# Altium PCB final_sensor_pcb_v3.PcbDoc (part 3 of 3)
Units mm, origin at the board's own origin, x right, y up, seen from the top; angles counter-clockwise.
Board outline 108.2 x 22.22 mm, 2 copper layers (Top Layer, Bottom Layer); 94 components, 57 nets, 253 pads, 98 vias.
Unrouted connection lines stored in the file: 1.
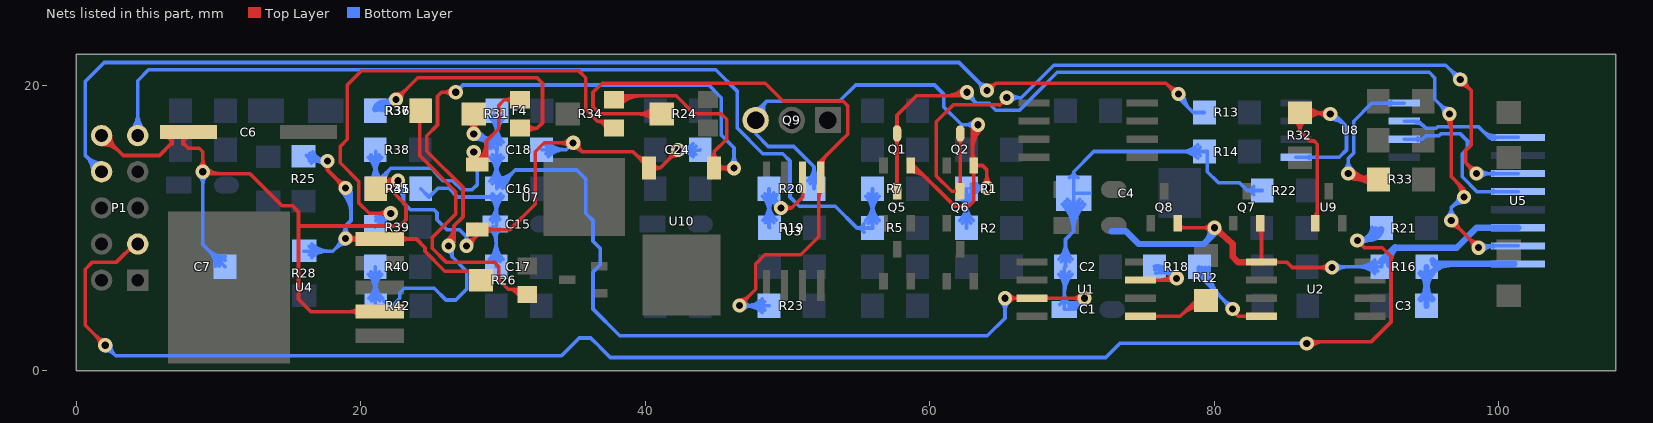
[diagram p3: the nets of this part, all layers, seen from the top]

## Via types
v1: diameter 1, hole 0.5, Top Layer to Bottom Layer, 98 vias

## Nets (pads, with @x,y where several pads share a name; then routed paths per layer and width w, separated by ;. In a path a pad name is that pad's centre, name@x,y a point inside that pad or via, vN(x,y) a via of type N, cw(c..) or ccw(c..) an arc to the next point about the centre after c; other vN are vias at no path point) (continued)
NetR18_1: R18.1 U2.4 | length 14.8
  Top Layer w0.254: v1(81.28,4.318) 81.28,4.191 81.661,3.81 U2.4@83.312,3.81 ; U2.4@82.375,3.723 ccw(c82.165,3.513) 82.165,3.81 ccw(c82.165,4.107) U2.4@82.375,3.897
  Bottom Layer w0.254: R18.1@78.854,7.24 ccw(c80.051,7.24) 79.205,6.393 ; R18.1@78.943,7.29 78.943,6.655 v1(81.28,4.318) ; R18.1@79.108,7.24 ccw(c80.918,7.24) 79.638,5.96 ; R18.1@79.362,7.24 ccw(c81.786,7.24) 80.072,5.526 ; R18.1@79.616,7.24 ccw(c82.653,7.24) 80.506,5.092 ; v1@80.907,4.318 ccw(c80.007,4.318) 80.643,4.955 ccw(c81.28,5.591) v1@81.28,4.691
NetR19_2: R19.2 R20.1 U3.6 | length 20.4
  Top Layer w0.254: v1(49.53,11.43) 50.292,11.43 ; v1@49.825,11.201 cw(c50.292,10.838) 50.292,11.43 ; v1@49.825,11.659 ccw(c50.292,12.022) 50.292,11.43 ; U3.6@50.967,12.648 cw(c50.757,12.438) 51.054,12.438 cw(c51.351,12.438) U3.6@51.141,12.648 ; U3.6@51.054,13.585 51.054,12.192 50.292,11.43
  Bottom Layer w0.254: R20.1@48.216,12.25 cw(c47.067,11.101) 48.692,11.101 cw(c50.317,11.101) R20.1@49.168,12.25 ; R19.2@48.253,10.559 ccw(c47.195,11.618) 48.692,11.618 ; R20.1@48.396,12.43 cw(c47.68,11.715) 48.692,11.715 cw(c49.703,11.715) R20.1@48.988,12.43 ; R19.2@48.433,10.379 ccw(c47.808,11.004) 48.692,11.004 ; 48.692,11.185 ccw(c49.831,11.185) R19.2@49.025,10.379 ; 48.692,11.798 ccw(c50.444,11.798) R19.2@49.205,10.559 ; R20.1@48.692,12.053 cw(c48.692,11.534) 49.059,11.901 ; R20.1@48.692,12.649 R20.1@48.692,12.776 R20.1@48.692,12.268 ; R19.2@48.729,10.033 48.692,10.07 R20.1@48.692,12.268 ; R20.1@49.035,12.485 ccw(c49.425,12.21) 49.087,11.873 ; v1@49.157,11.43 ccw(c48.257,11.43) 48.893,12.067 ccw(c49.53,12.703) v1@49.53,11.803 ; R20.1@49.242,12.339 ccw(c49.676,12.034) v1@49.301,11.659 ; v1(49.53,11.43) R20.1@48.692,12.268
NetR23_1: R23.1 R24.2 U3.5 | length 58.9
  Top Layer w0.254: 36.322,19.558 36.322,18.542 36.83,18.034 R24.2@41.149,18.034 ; 36.325,19.558 36.96,20.193 48.419,20.193 49.689,18.923 53.9,18.923 54.229,18.594 54.229,16.61 53.915,16.296 53.888,16.296 52.324,14.732 ; R24.2@40.623,17.558 ccw(c39.474,16.409) 39.474,18.034 ccw(c39.474,19.659) R24.2@40.623,18.51 ; R24.2@40.803,17.738 ccw(c40.087,17.022) 40.087,18.034 ccw(c40.087,19.046) R24.2@40.803,18.33 ; v1(46.609,4.572) 47.752,5.715 47.752,7.493 48.387,8.128 50.927,8.128 52.197,9.398 52.197,13.458 U3.5@52.324,13.585 52.324,14.732 ; v1@46.609,4.945 ccw(c46.609,5.845) 47.246,5.209 ccw(c47.882,4.572) v1@46.982,4.572 ; U3.5@52.193,14.435 cw(c52.594,14.435) 52.31,14.718 ; 52.197,12.131 cw(c52.928,12.131) U3.5@52.411,12.648 ; U3.5@52.237,14.522 ccw(c52.027,14.732) 52.324,14.732 ; U3.5@52.411,14.522 cw(c52.621,14.732) 52.324,14.732 ; U3.5@52.447,14.435 cw(c53.461,14.435) 52.744,15.152
  Bottom Layer w0.254: v1(46.609,4.572) 46.634,4.547 R23.1@48.692,4.547 ; v1@46.873,4.308 cw(c47.448,3.733) 47.448,4.547 ; v1@46.873,4.836 ccw(c47.571,5.534) 47.571,4.547 ; R23.1@48.216,4.071 ccw(c47.067,2.922) 47.067,4.547 ccw(c47.067,6.171) R23.1@48.216,5.023 ; R23.1@48.396,4.25 ccw(c47.68,3.535) 47.68,4.547 ccw(c47.68,5.558) R23.1@48.396,4.843
NetR25_1: R25.1 R26.2 R28.2 U4.5 | length 43.1
  Top Layer w0.254: v1@17.471,14.406 cw(c17.299,14.097) 17.653,14.097 ; v1(17.653,14.732) 17.653,14.097 ; v1@17.835,14.406 ccw(c18.007,14.097) 17.653,14.097 ; v1@18.55,12.827 ccw(c17.65,12.827) 18.286,13.464 ccw(c18.923,14.1) v1@18.923,13.2 ; v1(18.923,9.271) U4.5@20.447,9.271 ; v1(18.923,12.827) 17.653,14.097 ; v1@19.165,9.271 cw(c19.165,8.271) U4.5@19.872,8.978 ; v1@19.187,9.007 cw(c19.823,8.371) 19.823,9.271 cw(c19.823,10.171) v1@19.187,9.535 ; v1@19.306,9.271 ccw(c19.306,10.072) U4.5@19.872,9.506 ; U4.5@21.336,9.242 23.905,9.242 24.511,8.636 24.511,8.382 25.908,6.985 27.814,6.985 R26.2@28.449,6.35 R26.2@28.575,6.35 ; U4.5@22.8,8.978 cw(c23.436,8.342) 23.436,9.242 cw(c23.436,10.142) U4.5@22.8,9.506
  Bottom Layer w0.254: R28.2@16.002,8.382 18.034,8.382 v1(18.923,9.271) 18.923,10.16 ; R25.1@16.174,15.136 ccw(c16.829,15.465) 16.829,14.732 ; R28.2@16.374,8.125 cw(c16.995,7.503) 16.995,8.382 ; R28.2@16.374,8.717 ccw(c17.183,9.526) 17.183,8.382 ; R25.1@16.383,14.732 v1(17.653,14.732) cw(c17.653,15.879) R25.1@16.628,15.364 ; R25.1@16.401,15.25 ccw(c17.241,15.672) v1@17.241,14.732 ; R25.1@16.503,14.586 cw(c16.854,14.235) 16.854,14.732 ; R28.2@16.553,7.945 cw(c17.609,6.89) 17.609,8.382 ; R28.2@16.553,8.897 ccw(c17.796,10.139) 17.796,8.382 ; v1@17.389,14.468 ccw(c16.753,13.832) 16.753,14.732 ccw(c16.753,15.632) v1@17.389,14.996 ; v1@18.55,9.271 cw(c17.65,9.271) 18.286,8.634 cw(c18.923,7.998) v1@18.923,8.898 ; v1@18.659,12.563 cw(c17.103,11.007) 19.304,11.007 ; v1@18.662,9.537 ccw(c18.05,10.16) 18.923,10.16 ; v1@18.839,12.743 cw(c17.716,11.62) 19.304,11.62 ; v1(18.923,12.827) 19.05,12.827 19.304,12.573 19.304,10.541 18.923,10.16 ; v1@19.018,12.922 cw(c18.329,12.233) 19.304,12.233 ; v1@19.184,9.537 cw(c19.796,10.16) 18.923,10.16
NetR26_1: R26.1 R36.1 | length 22.1
  Top Layer w0.254: R36.1@24.13,17.721 24.13,15.113 26.67,12.573 26.67,11.005 25.019,9.354 25.019,8.592 25.991,7.62 29.368,7.62 29.68,7.308 29.68,6.388 30.353,5.715 ; R36.1@24.206,18.263 R36.1@24.858,18.263 ; 30.731,5.715 cw(c30.731,4.997) R26.1@31.396,5.267 ; R26.1@31.108,5.715 cw(c31.108,5.15) R26.1@31.631,5.363 ; R26.1@31.161,5.172 ccw(c30.353,4.843) 30.353,5.715 ; R26.1@31.273,5.715 30.353,5.715
NetR31_1: R31.1 R37.1 | length 25.7
  Top Layer w0.254: v1(22.479,19.05) 24.003,20.574 32.385,20.574 32.766,20.193 32.766,17.399 32.385,17.018 ; v1@22.479,19.423 ccw(c22.479,20.323) 23.116,19.687 ccw(c23.752,19.05) v1@22.852,19.05 ; R31.1@31.242,17.018 32.385,17.018 ; R31.1@31.627,16.702 cw(c32.385,15.953) 32.385,17.018 ; R31.1@31.643,17.349 ccw(c32.385,18.013) 32.385,17.018
  Bottom Layer w0.254: R37.1@20.918,18.325 cw(c21.604,18.23) R37.1@21.604,18.923 ; R37.1@21.006,18.263 R37.1@21.666,18.923 ; R37.1@21.169,18.29 cw(c21.896,18.189) 21.896,18.923 ; R37.1@21.421,18.255 cw(c22.187,18.149) v1@22.187,18.923 ; R37.1@21.672,18.22 cw(c22.479,18.109) 22.479,18.923 R37.1@21.666,18.923 ; 21.885,18.923 cw(c21.885,18.456) v1@22.215,18.786 ; v1@22.146,19.218 cw(c21.666,19.461) R37.1@21.666,18.923
NetR31_3: R31.3 R38.1 R41.2 U7.1 | length 40.5
  Top Layer w0.254: U7.1@27.648,14.772 ccw(c27.187,15.367) v1(27.94,15.367) U7.1@27.94,14.605 ; v1@27.711,15.072 cw(c27.348,14.605) U7.1@27.94,14.605 ; v1@27.94,15.225 ccw(c28.625,15.225) U7.1@28.141,14.741 ; v1@28.169,15.072 ccw(c28.532,14.605) U7.1@27.94,14.605 ; U7.1@28.177,14.477 28.574,14.477 28.829,14.732 28.829,16.129 ; U7.1@28.224,14.752 ccw(c26.958,16.129) 28.829,16.129 ; U7.1@28.396,14.565 ccw(c27.49,15.55) 28.829,15.55 ; U7.1@28.568,14.378 ccw(c28.022,14.971) U7.1@28.829,14.971 ; R31.3@30.727,18.732 ccw(c30.083,18.196) 30.083,19.034 ; R31.3@30.727,19.336 cw(c30.083,19.872) 30.083,19.034 ; R31.3@31.191,19.034 30.083,19.034 ; 28.829,16.129 29.683,16.983 29.683,18.634 30.083,19.034
  Bottom Layer w0.254: R38.1@20.53,14.994 cw(c19.291,13.754) 21.043,13.754 ; R41.2@20.567,13.302 ccw(c19.418,14.451) 21.043,14.451 ccw(c22.668,14.451) R41.2@21.519,13.302 ; R38.1@20.71,15.173 cw(c19.904,14.368) 21.043,14.368 ; R41.2@20.747,13.123 ccw(c20.032,13.838) 21.043,13.838 ccw(c22.055,13.838) R41.2@21.339,13.123 ; R41.2@21.043,13.499 ccw(c21.043,14.296) 21.607,13.733 ; 21.043,13.935 cw(c22.54,13.935) R38.1@21.482,14.994 ; 21.043,14.548 cw(c21.927,14.548) R38.1@21.302,15.173 ; R38.1@21.043,15.406 R41.2@21.043,12.776 21.043,13.169 22.098,14.224 ; R41.2@21.205,12.857 cw(c21.962,12.999) R41.2@21.418,13.544 ; R41.2@21.455,12.904 cw(c22.534,13.107) 21.758,13.884 ; R41.2@21.705,12.951 cw(c23.107,13.215) 22.098,14.224 ; v1(27.94,15.367) 27.94,14.859 28.194,14.605 28.194,13.081 27.813,12.7 27.11,12.7 26.483,13.327 25.789,13.327 25.387,13.729 25.387,13.784 24.947,14.224 22.098,14.224
NetR32_1: R32.1 U8.5 U9.1 | length 27.7
  Top Layer w0.254: R32.1@85.636,17.547 cw(c85.19,16.866) 86.004,16.866 ; R32.1@86.351,17.814 cw(c87.066,17.099) 87.066,18.11 cw(c87.066,19.122) R32.1@86.351,18.406 ; R32.1@86.373,17.547 ccw(c86.819,16.866) 86.004,16.866 ; R32.1@86.53,17.634 cw(c87.679,16.485) 87.679,18.11 cw(c87.679,19.735) R32.1@86.53,18.586 ; U9.1@86.97,10.746 ccw(c86.328,11.388) 87.235,11.388 ; 87.054,18.11 cw(c87.054,16.95) v1@87.874,17.77 ; U9.1@87.092,10.349 87.235,10.492 87.235,15.905 87.012,16.128 86.742,16.128 86.004,16.866 ; 87.421,18.11 ccw(c87.421,18.751) v1@87.874,18.298 ; v1@88.062,18.11 R32.1@86.004,18.11 86.004,16.866
  Bottom Layer w0.254: U8.5@85.729,14.986 88.773,14.986 89.281,15.494 89.281,17.145 88.646,17.78 88.392,17.78 v1(88.138,18.034) ; U8.5@86.666,14.899 cw(c86.876,14.689) 86.876,14.986 cw(c86.876,15.283) U8.5@86.666,15.073 ; v1@88.138,17.661 cw(c88.138,16.147) 89.208,17.218 ; v1@88.138,17.915 cw(c88.138,17.015) 88.775,17.651
NetR33_2: R33.2 U8.1 | length 20.2
  Top Layer w0.254: v1@89.313,13.748 ccw(c90.063,14.498) 90.063,13.437 ; v1(89.408,13.843) 89.814,13.437 R33.2@91.528,13.437 ; v1@89.492,13.927 ccw(c90.676,15.111) 90.676,13.437 ; v1@89.672,14.107 ccw(c91.29,15.725) R33.2@91.29,13.437 ; R33.2@91.052,12.961 ccw(c89.903,11.812) 89.903,13.437 ccw(c89.903,15.061) R33.2@91.052,13.912 ; R33.2@91.232,13.14 ccw(c90.517,12.425) 90.517,13.437 ccw(c90.517,14.448) R33.2@91.232,13.733
  Bottom Layer w0.254: v1@89.144,14.107 ccw(c88.508,14.743) 89.408,14.743 ccw(c90.308,14.743) v1@89.672,14.107 ; v1(89.408,13.843) 89.408,14.903 89.789,15.284 89.789,17.526 91.059,18.796 U8.1@93.345,18.796 ; U8.1@92.408,18.709 ccw(c92.198,18.499) 92.198,18.796 ccw(c92.198,19.093) U8.1@92.408,18.883
NetR34_1: R34.1 R39.1 | length 44.9
  Top Layer w0.254: v1@21.834,10.785 ccw(c21.198,10.149) 21.198,11.049 ccw(c21.198,11.949) v1@21.834,11.313 ; v1(22.098,11.049) 20.582,11.049 19.862,11.769 19.862,13.285 18.542,14.605 18.542,15.748 19.05,16.256 19.05,20.066 20.066,21.082 35.306,21.082 35.814,20.574 35.814,18.332 36.62,17.526 ; 36.903,17.526 cw(c36.903,16.948) R34.1@37.477,17.01 ; R34.1@37.186,17.526 cw(c37.186,16.979) R34.1@37.73,17.038 ; R34.1@37.225,16.983 ccw(c36.62,16.917) 36.62,17.526 ; R34.1@37.795,17.034 37.303,17.526 36.62,17.526
  Bottom Layer w0.254: R39.1@21.006,10.08 v1@22.098,11.172 ; R39.1@21.044,10.547 ccw(c21.122,11.383) R39.1@21.715,10.789 ; R39.1@21.068,10.8 ccw(c21.187,12.083) v1@22.098,11.172 ; R39.1@21.251,10.325 cw(c22.098,9.478) v1@22.098,10.676 ; R39.1@21.425,10.136 cw(c22.272,10.148) R39.1@21.673,10.747 ; R39.1@21.548,10.622 ccw(c21.122,11.049) v1@21.725,11.049 ; R39.1@21.679,10.139 cw(c23.11,10.16) v1@22.098,11.172 ; R39.1@21.685,10.759 cw(c22.098,10.346) v1@22.098,10.93 ; v1(22.098,11.049) v1@22.098,11.172
NetR34_3: R34.3 R40.1 R42.2 U10.1 | length 89.2
  Top Layer w0.254: v1@25.959,9.076 ccw(c25.248,10.168) 26.551,10.168 ; v1@26.097,8.863 ccw(c25.553,9.7) 26.551,9.7 ; v1@26.236,8.65 ccw(c25.857,9.231) 26.551,9.231 ; v1@26.406,19.294 ccw(c25.77,18.658) 25.77,19.558 ccw(c25.77,20.458) v1@26.406,19.822 ; v1@26.551,9.017 26.551,10.168 ; v1(26.67,19.558) 25.675,19.558 25.387,19.27 25.387,17.255 24.638,16.506 24.638,15.411 27.178,12.871 27.178,10.795 26.551,10.168 ; R34.3@37.87,19.059 cw(c38.462,18.467) R34.3@38.462,19.304 ; R34.3@38.05,18.879 cw(c39.076,17.853) 39.076,19.304 ; R34.3@38.229,18.7 cw(c39.689,17.24) 39.689,19.304 ; R34.3@38.354,19.177 38.481,19.304 42.164,19.304 43.434,18.034 45.339,18.034 45.72,17.653 45.72,16.256 44.83,15.366 ; U10.1@44.584,14.821 ccw(c44.104,15.366) 44.83,15.366 ; U10.1@45.076,14.821 cw(c45.556,15.366) 44.83,15.366 ; U10.1@45.094,13.977 cw(c45.73,13.341) 45.73,14.241 cw(c45.73,15.142) U10.1@45.094,14.505 ; U10.1@45.286,14.241 cw(c45.286,13.282) v1@45.964,13.96 ; 45.369,14.241 ccw(c45.369,15.083) v1@45.964,14.488 ; v1@46.211,14.241 U10.1@44.83,14.241 44.83,15.366
  Bottom Layer w0.254: R40.1@20.53,6.764 cw(c19.381,5.615) 21.006,5.615 cw(c22.631,5.615) R40.1@21.482,6.764 ; R42.2@20.567,5.073 ccw(c19.509,6.131) 21.006,6.131 ; R40.1@20.71,6.944 cw(c19.994,6.228) 21.006,6.228 cw(c22.017,6.228) R40.1@21.302,6.944 ; R42.2@20.747,4.893 ccw(c20.122,5.518) 21.006,5.518 ; R42.2@21.006,4.521 R40.1@21.006,7.29 ; 21.006,5.699 ccw(c22.145,5.699) R42.2@21.339,4.893 ; 21.006,6.312 ccw(c22.758,6.312) R42.2@21.519,5.073 ; R42.2@21.043,4.547 22.2,4.547 ; R42.2@21.628,4.214 cw(c22.2,3.89) 22.2,4.547 ; R42.2@21.628,4.879 ccw(c22.2,5.204) 22.2,4.547 ; v1@26.071,8.401 cw(c25.961,7.96) 26.416,7.96 ; v1@26.133,8.648 cw(c26.042,8.285) 26.416,8.285 ; v1@26.416,8.763 26.416,8.001 27.432,6.985 27.432,5.715 26.67,4.953 25.989,4.953 25.164,5.778 23.05,5.778 22.733,5.461 22.733,5.08 22.2,4.547 ; v1(26.67,19.558) 27.178,20.066 44.45,20.066 45.339,19.177 45.339,16.554 46.228,15.665 v1(46.228,14.224) ; v1@45.964,14.488 ccw(c45.328,15.124) 46.228,15.124 ccw(c47.128,15.124) v1@46.492,14.488
  other v1: 26.162,8.763
OFFSET+: Q1.3 Q5.3 U5.2 | length 82.2
  Top Layer w0.254: Q5.3@57.567,12.996 ccw(c57.272,13.292) 57.689,13.292 ccw(c58.107,13.292) Q5.3@57.811,12.996 ; Q1.3@57.567,16.266 cw(c57.271,15.97) 57.689,15.97 cw(c58.107,15.97) Q1.3@57.811,16.266 ; Q1.3@57.567,17.06 ccw(c57.271,17.356) 57.689,17.356 ccw(c58.107,17.356) Q1.3@57.811,17.06 ; Q5.3@57.689,12.599 Q1.3@57.689,16.663 57.689,17.938 59.055,19.304 62.484,19.304 v1@62.611,19.431 ; 61.097,19.304 ccw(c61.097,21.072) v1@62.347,19.822 ; 61.711,19.304 ccw(c61.711,20.458) v1@62.527,19.642 ; v1@96.256,17.77 cw(c95.313,16.827) 96.647,16.827 ; v1@96.436,17.95 cw(c95.926,17.44) 96.647,17.44 cw(c97.114,17.44) v1@96.784,17.77 ; v1@96.647,10.168 cw(c96.647,9.268) 97.284,9.904 cw(c97.92,10.541) v1@97.02,10.541 ; v1(96.647,10.541) v1(98.552,8.636) ; v1@96.647,18.145 96.647,13.633 97.536,12.744 v1(97.536,12.192) ; 96.943,13.337 cw(c95.798,12.192) v1@97.417,12.192 ; 97.376,12.903 cw(c96.665,12.192) v1@97.671,12.192 ; v1@98.179,8.636 ccw(c97.279,8.636) 97.915,9.273 ccw(c98.552,9.909) v1@98.552,9.009
  Bottom Layer w0.254: v1@62.611,19.185 cw(c62.611,18.591) 63.031,19.011 ; v1@62.611,19.431 63.246,18.796 64.135,18.796 64.635,18.296 66.302,18.296 67.31,19.304 ; v1@62.979,19.496 ccw(c63.698,19.375) 63.182,18.86 ; 67.373,19.367 67.31,19.304 ; v1@96.147,18.034 ccw(c95.247,18.034) 95.883,18.671 ccw(c96.52,19.307) v1@96.52,18.407 ; v1@96.383,10.805 ccw(c95.747,11.441) 96.647,11.441 ccw(c97.547,11.441) v1@96.911,10.805 ; v1(96.52,18.034) 95.496,19.058 95.496,20.558 95.099,20.955 68.961,20.955 67.31,19.304 ; 96.641,11.448 cw(c97.536,10.554) v1@97.536,11.819 ; v1(96.647,10.541) 96.647,11.454 v1@97.46,12.268 ; 97.006,11.813 ccw(c96.627,12.192) v1@97.163,12.192 ; 97.075,11.882 cw(c97.536,11.421) v1@97.536,12.073 ; v1(98.552,8.636) 98.425,8.763 U5.2@101.346,8.763 ; v1@98.636,8.552 cw(c99.146,8.042) 99.146,8.763 cw(c99.146,9.23) v1@98.816,8.9 ; v1@98.816,8.372 cw(c99.759,7.429) U5.2@99.759,8.763 ; U5.2@99.604,8.676 ccw(c99.394,8.466) 99.394,8.763 ccw(c99.394,9.06) U5.2@99.604,8.85
  other v1: 62.611,19.558
OFFSET-: Q2.3 Q6.3 U5.6 | length 69
  Top Layer w0.254: Q6.3@62.012,12.477 ccw(c61.716,12.181) 61.716,12.599 ccw(c61.716,13.017) Q6.3@62.012,12.721 ; Q6.3@62.012,12.996 ccw(c61.716,13.292) 62.134,13.292 ccw(c62.552,13.292) Q6.3@62.256,12.996 ; Q2.3@62.012,16.266 cw(c61.716,15.97) 62.134,15.97 cw(c62.552,15.97) Q2.3@62.256,16.266 ; Q6.3@62.134,12.599 61.525,12.599 60.452,13.672 60.452,17.482 61.639,18.669 64.881,18.669 64.889,18.661 v1@65.389,19.034 ; Q6.3@62.134,12.599 Q2.3@62.134,16.663 ; v1@97.282,20.074 cw(c97.282,19.174) 97.919,19.81 cw(c98.555,20.447) v1@97.655,20.447 ; v1(97.282,20.447) 98.044,19.685 98.044,15.851 97.663,15.47 97.663,14.605 v1(98.425,13.843) v1@98.171,14.097 ; v1@98.052,13.843 ccw(c97.152,13.843) 97.788,14.48 ccw(c98.425,15.116) v1@98.425,14.216
  Bottom Layer w0.254: v1(65.405,19.177) 66.421,19.177 68.707,21.463 96.266,21.463 v1(97.282,20.447) ; v1@65.669,18.913 cw(c66.305,18.277) 66.305,19.177 cw(c66.305,20.077) v1@65.669,19.441 ; v1@96.909,20.447 ccw(c96.009,20.447) 96.645,21.084 ccw(c97.282,21.72) v1@97.282,20.82 ; v1(98.425,13.843) U5.6@101.346,13.843 ; v1@98.689,13.579 cw(c99.325,12.943) 99.325,13.843 cw(c99.325,14.743) v1@98.689,14.107 ; U5.6@99.604,13.756 ccw(c99.394,13.546) 99.394,13.843 ccw(c99.394,14.14) U5.6@99.604,13.93
OP_OUT: Q1.2 Q2.2 Q9.3 R1.2 R2.2 R20.2 | length 73.6
  Top Layer w0.254: Q1.2@58.639,13.965 cw(c58.639,12.335) 59.791,13.488 ; Q1.2@58.639,14.219 cw(c58.639,13.203) 59.358,13.921 ; Q1.2@58.639,14.413 58.866,14.413 61.722,11.557 62.738,11.557 63.084,11.903 Q2.2@63.084,14.413 ; Q1.2@58.639,14.473 cw(c58.639,14.07) Q1.2@58.924,14.355 ; Q2.2@62.962,14.016 cw(c62.666,13.72) 63.084,13.72 cw(c63.502,13.72) Q2.2@63.206,14.016 ; 62.992,15.328 ccw(c63.724,15.328) Q2.2@63.206,14.81 ; 62.992,15.452 cw(c65.193,15.452) v1@63.637,17.008 ; 62.992,16.065 cw(c64.58,16.065) v1@63.457,17.188 ; 62.992,16.678 cw(c63.967,16.678) v1@63.278,17.367 ; v1@62.992,17.018 62.992,14.505 Q2.2@63.084,14.413 ; Q2.2@63.206,14.291 cw(c63.502,13.995) 63.502,14.413 cw(c63.502,14.831) Q2.2@63.206,14.535 ; v1@63.744,13.091 ccw(c63.108,13.727) 64.008,13.727 ccw(c64.908,13.727) v1@64.272,13.091 ; v1(64.008,12.827) 64.008,14.097 63.692,14.413 Q2.2@63.084,14.413
  Bottom Layer w0.254: Q9.3@47.752,18.4 ccw(c47.752,18.977) 48.16,18.569 ; Q9.3@47.995,17.76 cw(c48.477,18.073) 48.071,18.48 ; Q9.3@48.208,17.899 cw(c48.746,18.248) 48.292,18.701 ; Q9.3@48.421,18.037 cw(c49.014,18.423) 48.514,18.923 ; R20.2@51.411,13.332 ccw(c50.551,14.312) 51.855,14.312 ; R20.2@51.578,13.141 ccw(c51.043,13.751) 51.855,13.751 ccw(c52.667,13.751) R20.2@52.131,13.141 ; R20.2@51.855,12.776 51.855,14.312 ; R20.2@52.299,13.332 cw(c53.159,14.312) 51.855,14.312 ; R2.2@62.096,10.543 ccw(c60.947,11.691) 62.572,11.691 ccw(c64.197,11.691) R2.2@63.048,10.543 ; R1.2@62.096,12.25 cw(c60.947,11.101) 62.572,11.101 cw(c64.197,11.101) R1.2@63.048,12.25 ; R2.2@62.276,10.363 ccw(c61.561,11.078) 62.572,11.078 ccw(c63.584,11.078) R2.2@62.868,10.363 ; R1.2@62.276,12.43 cw(c61.561,11.715) 62.572,11.715 cw(c63.584,11.715) R1.2@62.868,12.43 ; R2.2@62.572,10.017 R1.2@62.572,12.776 ; R1.2@62.826,12.827 v1(64.008,12.827) ; R1.2@62.895,12.558 cw(c63.467,12.083) 63.467,12.827 ; R1.2@62.894,13.095 ccw(c63.465,13.571) 63.465,12.827 ; v1@62.992,17.272 62.23,17.272 60.96,18.542 60.96,19.431 60.325,20.066 54.781,20.066 53.638,18.923 48.514,18.923 ; R1.2@63.089,13.257 ccw(c64.008,14.023) v1(64.008,12.827) ; R1.2@63.09,12.396 cw(c64.008,11.634) v1(64.008,12.827) ; v1@63.109,17.008 ccw(c62.473,16.372) 62.473,17.272 ccw(c62.473,18.172) v1@63.109,17.536 ; v1@63.744,12.563 ccw(c63.108,11.927) 63.108,12.827 ccw(c63.108,13.727) v1@63.744,13.091 ; 48.514,18.923 47.752,18.161 47.752,16.637 48.641,15.748 50.419,15.748 51.855,14.312
  other v1: 63.373,17.272
OUT_N: U5.8 U8.2 | length 12.8
  Bottom Layer w0.254: U8.2@93.345,17.526 94.361,17.526 94.869,17.018 95.572,17.018 95.691,17.137 98.56,17.137 99.314,16.383 U5.8@101.346,16.383 U5.8@99.568,16.383 ; U8.2@94.195,17.403 cw(c94.195,16.705) 94.688,17.199 ; 98.837,16.86 ccw(c99.691,17.713) U5.8@99.691,16.506 ; 99.271,16.426 ccw(c99.691,16.846) U5.8@99.691,16.252 ; U5.8@99.604,16.296 ccw(c99.394,16.086) 99.394,16.383 ccw(c99.394,16.68) U5.8@99.604,16.47
OUT_P: U5.5 U8.3 | length 12.8
  Bottom Layer w0.254: U8.3@93.345,16.256 94.615,16.256 94.869,16.51 95.782,16.51 95.901,16.629 97.29,16.629 97.79,16.129 97.79,15.621 97.409,15.24 97.409,13.613 98.449,12.573 U5.5@101.346,12.573 ; U8.3@94.282,16.169 cw(c94.492,15.959) 94.492,16.256 cw(c94.492,16.553) U8.3@94.282,16.343 ; U5.5@99.604,12.486 ccw(c99.394,12.276) 99.394,12.573 ccw(c99.394,12.87) U5.5@99.604,12.66
OUT_RESET: R12.2 U1.5 | length 9.7
  Top Layer w0.254: U1.5@74.799,3.81 77.597,3.81 78.713,4.926 R12.2@79.4,4.926 ; U1.5@75.736,3.723 cw(c75.946,3.513) 75.946,3.81 cw(c75.946,4.107) U1.5@75.736,3.897 ; 77.675,3.888 cw(c79.183,2.379) R12.2@79.323,4.508 ; 78.071,4.284 cw(c79.232,3.123) R12.2@79.34,4.762 ; 78.468,4.681 cw(c79.281,3.867) R12.2@79.356,5.015
OUT_SET: R18.2 U1.7 | length 12.5
  Top Layer w0.254: U1.7@74.799,6.35 77.216,6.35 v1(77.343,6.477) ; U1.7@75.736,6.263 cw(c75.946,6.053) 75.946,6.35 cw(c75.946,6.647) U1.7@75.736,6.437 ; 76.136,6.35 ccw(c76.136,7.684) v1@77.079,6.741 ; v1@77.079,6.213 ccw(c76.749,5.883) 76.749,6.35 ccw(c76.749,7.071) v1@77.259,6.561
  Bottom Layer w0.254: R18.2@75.759,7.326 cw(c76.014,6.27) 76.782,7.038 ; R18.2@75.78,7.29 76.53,7.29 v1(77.343,6.477) ; R18.2@75.819,7.079 cw(c76.138,5.754) v1@77.102,6.718 ; R18.2@75.878,6.832 cw(c76.263,5.237) v1@77.423,6.397 ; v1@76.97,6.477 ccw(c76.07,6.477) 76.706,7.114 ccw(c77.343,7.75) v1@77.343,6.85
P_CURRENT: P1.9 R5.2 R7.2 | length 79.5
  Bottom Layer w0.254: P1.9@3.877,16.951 ccw(c2.814,18.014) 4.318,18.014 ccw(c5.822,18.014) P1.9@4.759,16.951 ; P1.9@4.057,16.771 ccw(c3.427,17.401) 4.318,17.401 ccw(c5.209,17.401) P1.9@4.579,16.771 ; P1.9@4.318,16.51 4.318,20.376 5.08,21.138 14.732,21.138 ; 14.661,21.138 14.732,21.138 ; R5.2@55.366,9.716 ccw(c54.88,9.474) 54.88,10.017 ; R5.2@55.366,10.317 cw(c54.88,10.559) 54.88,10.017 ; R5.2@55.492,10.543 ccw(c54.343,11.691) 55.968,11.691 ccw(c57.593,11.691) R5.2@56.444,10.543 ; R7.2@55.492,12.25 cw(c54.343,11.101) 55.968,11.101 cw(c57.593,11.102) R7.2@56.444,12.25 ; R5.2@55.672,10.363 ccw(c54.957,11.078) 55.968,11.078 ccw(c56.98,11.078) R5.2@56.264,10.363 ; R7.2@55.672,12.43 cw(c54.956,11.715) 55.968,11.715 cw(c56.98,11.715) R7.2@56.264,12.43 ; R7.2@55.968,12.776 R5.2@55.968,10.017 54.88,10.017 ; 14.732,21.138 44.957,21.138 46.446,19.649 46.446,17.054 48.26,15.24 49.657,15.24 50.165,14.732 50.165,12.192 50.812,11.545 53.352,11.545 54.88,10.017
RESET: P1.8 R13.1 | length 97.6
  Top Layer w0.254: v1@64.102,20.046 ccw(c64.244,20.592) 64.643,20.193 ; v1@64.135,19.685 64.643,20.193 ; v1@64.381,19.685 cw(c64.975,19.685) 64.555,20.105 ; 76.645,20.129 ccw(c77.431,20.916) v1@77.46,19.804 ; 76.923,19.851 cw(c76.503,19.431) v1@77.097,19.431 ; v1@77.216,19.558 v1@77.343,19.431 ; v1@77.47,19.304 v1@77.343,19.431 ; 64.643,20.193 76.581,20.193 v1@77.343,19.431
  Bottom Layer w0.254: 0.635,16.966 0.635,15.113 P1.8@1.778,13.97 ; 0.635,17.018 0.635,20.32 1.961,21.646 62.047,21.646 v1(64.008,19.685) ; P1.8@1.155,13.97 ccw(c-0.349,13.97) 0.714,15.034 ccw(c1.778,16.097) P1.8@1.778,14.593 ; P1.8@1.409,13.97 ccw(c0.518,13.97) 1.148,14.6 ccw(c1.778,15.23) P1.8@1.778,14.339 ; v1@63.635,19.685 ccw(c62.735,19.685) 63.371,20.322 ccw(c64.008,20.958) v1@64.008,20.058 ; v1(77.47,19.431) 77.47,19.304 77.597,19.177 77.597,19.05 78.511,18.136 R13.1@79.297,18.136 ; v1@77.589,19.431 ccw(c78.489,19.431) 77.853,18.794 ; v1@77.843,19.431 ccw(c79.357,19.431) 78.286,18.361
SET: P1.3 R21.1 | length 124.5
  Top Layer w0.254: v1@1.659,1.778 ccw(c0.759,1.778) 1.395,2.415 ccw(c2.032,3.051) v1@2.032,2.151 ; v1(2.032,1.778) 0.635,3.175 0.635,7.112 1.143,7.62 2.831,7.62 4.101,8.89 P1.3@4.318,8.89 ; v1@86.487,1.651 86.868,2.032 91.039,2.032 92.409,3.402 92.409,8.028 91.801,8.636 90.551,8.636 v1(90.043,9.144) ; v1@86.571,1.821 cw(c87.081,1.311) 87.081,2.032 cw(c87.081,2.499) v1@86.751,2.169 ; v1@86.751,1.641 cw(c87.694,0.698) 87.694,2.032
  Bottom Layer w0.254: v1@2.032,1.405 cw(c2.032,0.505) 2.669,1.141 cw(c3.305,1.778) v1@2.405,1.778 ; v1(2.032,1.778) 2.771,1.039 34.099,1.039 35.346,2.286 36.155,2.286 36.29,2.151 36.306,2.151 36.822,1.635 36.822,1.619 37.529,0.912 72.356,0.912 73.349,1.905 v1(86.487,1.905) ; v1@90.322,8.897 cw(c90.872,8.409) 90.872,9.144 ; v1@90.322,9.391 ccw(c90.872,9.879) 90.872,9.144 ; v1@90.332,9.144 ccw(c90.332,10.15) R21.1@91.329,10.02 ; 90.621,9.144 ccw(c90.621,10.112) R21.1@91.581,9.988 ; 90.91,9.144 ccw(c90.91,10.075) R21.1@91.833,9.955 ; R21.1@91.077,10.053 cw(c90.043,10.187) v1(90.043,9.144) 90.872,9.144 ; R21.1@91.745,10.017 90.872,9.144
SGND: C1.2 C2.2 C4.2 C15.2 C16.1 C17.1 C18.1 F4.2 Q7.2 Q8.2 R14.1 R16.2 R22.1 R31.2 R41.1 U1.3 U2.1 U5.3 | length 235
  Top Layer w0.254: R31.2@27.522,17.507 cw(c26.83,16.638) v1(27.94,16.637) ; v1@27.676,16.901 ccw(c27.037,17.54) R31.2@27.941,17.54 ; R31.2@27.68,17.706 cw(c27.249,17.165) 27.941,17.165 cw(c28.633,17.165) R31.2@28.202,17.706 ; v1(27.94,16.637) v1(27.94,16.637) ; R31.2@27.941,17.535 ccw(c28.838,17.535) v1@28.204,16.901 ; R31.2@27.941,18.034 v1(27.94,16.637) ; R31.2@28.36,17.507 ccw(c29.052,16.638) v1(27.94,16.637) ; v1(65.278,5.08) U1.3@67.183,5.08 v1(70.866,5.08) ; v1@65.542,4.816 cw(c66.179,4.179) 66.179,5.08 cw(c66.178,5.98) v1@65.542,5.344 ; U1.3@66.246,4.993 ccw(c66.036,4.783) 66.036,5.08 ccw(c66.036,5.377) U1.3@66.246,5.167 ; U1.3@68.12,4.993 cw(c68.33,4.783) 68.33,5.08 cw(c68.33,5.377) U1.3@68.12,5.167 ; v1@70.602,4.816 ccw(c69.965,4.179) 69.965,5.08 ccw(c69.966,5.98) v1@70.602,5.344 ; Q8.2@77.557,9.952 cw(c77.754,9.755) 77.754,10.033 ; Q8.2@77.557,10.196 ccw(c77.952,10.591) 77.952,10.033 ; Q8.2@77.624,10.033 v1(80.01,10.033) ; v1@79.746,9.769 ccw(c79.11,9.133) 79.11,10.033 ccw(c79.11,10.933) v1@79.746,10.297 ; Q7.2@83.091,9.952 cw(c82.558,9.419) 83.312,9.419 ; Q7.2@83.213,10.349 83.312,10.25 U2.1@83.312,7.62 85.09,7.62 85.471,7.239 v1(88.265,7.239) ; U2.1@83.225,7.707 ccw(c83.015,7.917) 83.312,7.917 ccw(c83.609,7.917) U2.1@83.399,7.707 ; U2.1@84.249,7.533 cw(c84.459,7.323) 84.459,7.62 cw(c84.459,7.917) U2.1@84.249,7.707 ; v1@88.001,6.975 ccw(c87.365,6.339) 87.365,7.239 ccw(c87.365,8.139) v1@88.001,7.503
  Top Layer w0.45: v1(80.01,10.033) 81.28,8.89 81.28,8.001 81.661,7.62 U2.1@83.312,7.62 ; v1@80.024,9.758 cw(c80.059,9.095) 80.503,9.589 cw(c80.948,10.082) v1@80.285,10.047
  Bottom Layer w0.254: R41.1@24.206,12.776 24.791,12.192 24.9,12.301 24.9,12.303 25.416,12.819 26.17,12.819 26.797,12.192 29.542,12.192 C15.2@29.542,10.234 ; v1@27.94,16.264 cw(c27.94,14.194) C18.1@29.403,15.658 ; v1@27.94,16.518 cw(c27.94,15.062) C18.1@28.97,16.091 ; v1(27.94,16.637) 28.424,16.637 C18.1@29.542,15.519 C16.1@29.542,12.776 30.862,14.097 35.179,14.097 35.814,13.462 35.814,11.049 36.322,10.541 36.322,9.076 36.822,8.576 36.822,7.426 36.322,6.926 36.322,4.318 38.204,2.436 64.031,2.436 65.278,3.683 v1(65.278,5.08) ; v1@27.94,16.772 cw(c27.94,15.929) 28.536,16.525 ; C18.1@28.832,16.229 ccw(c29.426,16.823) C18.1@29.503,15.987 ; C18.1@28.869,15.579 ccw(c27.436,15.599) 28.449,16.612 ccw(c29.361,17.524) C18.1@29.48,16.24 ; C18.1@28.875,16.187 cw(c28.275,15.587) C18.1@29.123,15.575 ; C17.1@29.039,7.816 ccw(c27.89,8.965) 29.515,8.965 ccw(c31.14,8.965) C17.1@29.991,7.816 ; C16.1@29.066,12.25 cw(c27.917,11.102) 29.542,11.102 cw(c31.167,11.102) C16.1@30.018,12.25 ; C16.1@29.066,13.302 ccw(c27.917,14.451) 29.542,14.451 ccw(c31.167,14.451) C16.1@30.018,13.302 ; C18.1@29.066,14.994 cw(c27.917,13.845) 29.542,13.845 cw(c31.167,13.845) C18.1@30.018,14.994 ; C18.1@29.066,16.045 ccw(c27.827,17.285) 29.579,17.285 ; F4.2@29.103,17.737 cw(c27.954,16.588) 29.579,16.588 cw(c31.204,16.588) F4.2@30.055,17.737 ; C15.2@29.104,9.949 cw(c28.113,8.957) 29.515,8.957 ; C15.2@29.104,10.617 ccw(c28.047,11.674) 29.542,11.674 ; C17.1@29.219,7.636 ccw(c28.503,8.351) 29.515,8.351 ccw(c30.526,8.351) C17.1@29.811,7.636 ; C16.1@29.246,12.43 cw(c28.53,11.715) 29.542,11.715 cw(c30.553,11.715) C16.1@29.838,12.43 ; C16.1@29.246,13.123 ccw(c28.53,13.838) 29.542,13.838 ccw(c30.553,13.838) C16.1@29.838,13.123 ; C18.1@29.246,15.173 cw(c28.53,14.458) 29.542,14.458 cw(c30.553,14.458) C18.1@29.838,15.173 ; C18.1@29.246,15.866 ccw(c28.44,16.671) 29.579,16.671 ; F4.2@29.283,17.916 cw(c28.568,17.201) 29.579,17.201 cw(c30.591,17.201) F4.2@29.875,17.916 ; C15.2@29.284,10.128 cw(c28.726,9.57) 29.515,9.57 ; C15.2@29.284,10.438 ccw(c28.661,11.061) 29.542,11.061 ; C17.1@29.515,7.29 C15.2@29.515,10.207 ; 29.515,9.325 cw(c30.396,9.325) C15.2@29.773,9.949 ; 29.542,11.176 ccw(c30.331,11.176) C15.2@29.773,10.617 ; C16.1@29.542,13.245 ccw(c29.542,14.378) 30.342,13.577 ; C16.1@29.542,13.499 ccw(c29.542,15.245) 30.776,14.011 ; C18.1@29.579,15.557 F4.2@29.579,18.263 ; 29.579,16.491 ccw(c30.463,16.491) C18.1@29.838,15.866 ; 29.579,17.104 ccw(c31.076,17.104) C18.1@30.018,16.045 ; C16.1@29.961,12.826 cw(c30.852,12.826) C16.1@30.222,13.456 ; C16.1@30.215,12.826 cw(c31.719,12.826) 30.655,13.89 ; v1@65.014,4.816 cw(c64.378,4.18) 65.278,4.18 cw(c66.178,4.18) v1@65.542,4.816 ; C2.2@69.056,6.764 cw(c68.09,5.798) 69.456,5.798 ; C2.2@69.056,7.816 ccw(c67.907,8.965) 69.532,8.965 ccw(c71.157,8.965) C2.2@70.008,7.816 ; C1.2@69.122,4.631 ccw(c68.314,5.439) 69.456,5.439 ccw(c70.598,5.439) C1.2@69.791,4.631 ; C2.2@69.236,6.943 cw(c68.703,6.411) 69.456,6.411 ; C2.2@69.236,7.636 ccw(c68.52,8.351) 69.532,8.351 ccw(c70.543,8.351) C2.2@69.828,7.636 ; C4.2@69.314,11.673 cw(c67.438,9.779) 70.104,9.779 ; 69.456,5.432 cw(c71.339,5.432) C2.2@70.008,6.764 ; 69.456,6.046 cw(c70.726,6.046) C2.2@69.828,6.943 ; C4.2@69.493,11.854 cw(c68.041,10.388) 70.104,10.388 cw(c72.167,10.388) C4.2@70.715,11.854 ; C4.2@69.671,12.034 cw(c68.644,10.997) 70.104,10.997 cw(c71.564,10.997) C4.2@70.537,12.034 ; C4.2@69.789,13.549 ccw(c69.666,13.97) 70.104,13.97 ; C1.2@69.796,4.512 ccw(c69.945,5.318) v1@70.524,4.738 ; C1.2@69.842,4.762 ccw(c70.051,5.895) v1(70.866,5.08) 70.083,4.297 C1.2@69.456,4.297 69.456,7.214 C2.2@69.532,7.29 69.532,9.207 70.104,9.779 ; C1.2@70.229,4.297 cw(c70.583,4.297) C1.2@70.333,4.547 ; C4.2@70.419,13.549 cw(c70.542,13.97) 70.104,13.97 ; v1@70.493,5.08 cw(c69.593,5.08) 70.229,4.443 cw(c70.866,3.807) v1@70.866,4.707 ; C4.2@70.894,11.673 ccw(c72.77,9.779) 70.104,9.779 ; C4.2@71.222,12.471 C4.2@70.104,12.471 ; R14.1@78.822,14.916 ccw(c77.673,13.768) 77.673,15.392 ccw(c77.673,17.017) R14.1@78.822,15.868 ; R14.1@79.001,15.096 ccw(c78.286,14.381) 78.286,15.392 ccw(c78.286,16.404) R14.1@79.001,15.689 ; R22.1@82.752,12.364 ccw(c82.303,12.154) 82.303,12.649 ; R22.1@82.752,12.934 cw(c82.303,13.144) 82.303,12.649 ; R22.1@83.361,12.649 82.303,12.649 ; v1(88.265,7.239) 88.646,7.239 88.697,7.29 R16.2@91.757,7.29 R16.2@91.757,7.683 ; v1@88.529,6.975 cw(c89.288,6.216) 89.288,7.29 ; v1@88.529,7.503 ccw(c89.043,8.017) 89.043,7.29 ; R16.2@91.281,6.814 ccw(c90.132,5.665) 90.132,7.29 ccw(c90.132,8.914) R16.2@91.281,7.765 ; R16.2@91.461,6.993 ccw(c90.745,6.278) 90.745,7.29 ccw(c90.745,8.301) R16.2@91.461,7.586 ; 70.104,9.779 C4.2@70.104,12.471 ; C4.2@70.104,12.471 70.104,13.97 ; 70.104,13.97 71.526,15.392 R14.1@79.297,15.392 79.502,15.392 79.502,13.97 80.264,13.208 81.744,13.208 82.303,12.649
  Bottom Layer w0.45: 72.771,9.779 73.787,9.779 74.676,8.89 79.248,8.89 80.01,9.652 v1(80.01,10.033) ; 79.439,9.081 ccw(c78.686,9.833) v1@79.738,9.992 ; 92.71,8.636 97.028,8.636 98.425,10.033 U5.3@101.346,10.033
  Bottom Layer w0.5: R16.2@91.757,7.683 92.71,8.636 ccw(c93.73,7.616) R16.2@92.302,7.416
SR+: C3.2 R16.1 U5.1 | length 15
  Bottom Layer w0.254: R16.1@94.908,7.277 R16.1@94.92,7.29
  Bottom Layer w0.45: C3.2@94.501,5.003 ccw(c93.52,5.985) 94.908,5.985 ccw(c96.296,5.985) C3.2@95.314,5.003 ; R16.1@94.513,6.833 cw(c93.561,5.88) 94.908,5.88 ; C3.2@94.908,4.547 R16.1@94.908,7.277 ; 94.908,5.822 cw(c96.337,5.822) R16.1@95.326,6.833 ; R16.1@95.326,6.933 cw(c96.678,5.581) 96.678,7.493 ; R16.1@95.326,7.746 ccw(c95.938,8.357) 95.938,7.493 ; R16.1@95.428,7.493 U5.1@101.092,7.493
VCC_IN: C6.1 C7.2 C18.2 C24.2 P1.10 R35.2 U4.2 U7.3 U10.3 | length 130.5
  Top Layer w0.254: P1.10@1.778,15.887 cw(c1.778,14.076) 3.058,15.357 ; P1.10@1.778,16.141 cw(c1.778,14.944) 2.625,15.79 ; P1.10@1.778,16.51 1.905,16.51 3.302,15.113 5.842,15.113 6.731,16.002 C6.1@6.731,16.764 ; P1.10@2.401,16.51 ccw(c3.598,16.51) 2.752,15.663 ; C6.1@6.321,16.395 cw(c6.254,15.923) 6.731,15.923 ; C6.1@6.357,16.646 cw(c6.296,16.215) 6.731,16.215 ; 7.493,15.912 cw(c7.978,15.912) C6.1@7.919,16.394 ; 7.493,16.199 cw(c7.943,16.199) C6.1@7.888,16.646 ; C6.1@7.493,16.51 7.493,16.002 7.874,15.621 8.636,15.621 8.89,15.367 v1(8.89,13.97) 8.89,13.843 12.192,13.843 14.462,11.573 15.194,11.573 15.621,11.146 15.621,10.16 ; v1@8.626,14.234 ccw(c7.99,14.87) 8.89,14.87 ccw(c9.79,14.87) 9.154,14.234 ccw(c10.097,15.177) 10.097,13.843 ; v1@8.974,14.054 ccw(c9.484,14.564) 9.484,13.843 ccw(c9.484,13.376) v1@9.154,13.706 ; U4.2@19.872,3.878 ccw(c19.236,3.242) 19.236,4.142 ccw(c19.236,5.042) U4.2@19.872,4.406 ; R35.2@20.408,12.065 R35.2@21.043,12.7 ; R35.2@21.272,13.177 ccw(c21.535,13.582) 21.877,13.241 ; U4.2@21.336,4.142 16.482,4.142 15.621,5.003 15.621,10.16 ; R35.2@21.411,13.39 ccw(c21.71,13.85) 22.098,13.462 ; R35.2@21.464,12.828 cw(c22.427,11.864) v1@22.592,13.217 ; R35.2@21.643,12.421 cw(c22.098,12.189) 22.098,12.7 ; R35.2@21.663,12.988 ccw(c22.098,13.172) 22.098,12.7 ; R35.2@21.716,12.826 cw(c22.329,12.826) 21.896,13.26 ; R35.2@21.833,13.197 cw(c22.507,12.522) v1@22.622,13.469 ; v1(22.606,13.335) 22.479,13.462 22.098,13.462 ; v1(27.432,8.763) 28.194,9.525 U7.3@28.194,9.906 ; v1@27.432,9.136 ccw(c27.432,10.036) 28.069,9.4 ccw(c28.705,8.763) v1@27.805,8.763 ; U7.3@28.177,9.907 30.481,9.907 32.258,11.684 32.258,15.367 32.893,16.002 v1(34.925,16.002) 35.56,15.367 ; U7.3@28.186,10.295 U7.3@28.194,10.287 ; U7.3@28.741,9.643 cw(c29.377,9.007) 29.377,9.907 cw(c29.377,10.808) U7.3@28.741,10.171 ; v1@34.661,15.738 ccw(c34.025,15.102) 34.025,16.002 ccw(c34.025,16.902) v1@34.661,16.266 ; v1@34.926,15.629 cw(c34.928,14.735) 35.56,15.367 ; v1@35.298,16.001 ccw(c36.192,15.999) 35.56,15.367 ; 39.284,15.217 ccw(c40.052,15.984) U10.3@40.207,14.91 ; 39.643,14.858 ccw(c40.142,15.358) U10.3@40.243,14.659 ; U10.3@40.551,14.007 cw(c41.038,13.616) 41.038,14.241 ; U10.3@40.551,14.475 ccw(c41.038,14.866) 41.038,14.241 ; v1@41.918,15.494 cw(c41.018,15.494) 41.654,14.857 cw(c42.291,14.221) v1@42.291,15.121 ; v1(42.291,15.494) 41.038,14.241 ; 15.621,10.16 22.733,10.16 23.175,10.602 23.175,11.618 23.025,11.769 23.025,11.773 22.098,12.7 ; R35.2@21.043,12.7 R35.2@21.043,12.776 21.412,12.776 22.098,13.462 ; R35.2@21.043,12.7 22.098,12.7 ; 35.56,15.367 39.134,15.367 U10.3@40.26,14.241 41.038,14.241
  Bottom Layer w0.254: v1@8.626,13.706 cw(c7.99,13.07) 8.89,13.07 cw(c9.79,13.07) v1@9.154,13.706 ; v1(8.89,13.97) 8.89,8.853 C7.2@10.453,7.29 ; 9.219,8.524 ccw(c10.453,9.758) C7.2@10.453,8.013 ; 9.339,8.403 cw(c8.276,7.34) C7.2@9.78,7.34 ; 9.652,8.091 ccw(c10.453,8.891) C7.2@10.453,7.759 ; C7.2@9.773,7.97 cw(c9.143,7.34) C7.2@10.034,7.34 ; v1@22.377,13.041 cw(c21.343,11.713) 23.025,11.713 ; v1@22.533,13.241 cw(c21.748,12.233) 23.025,12.233 ; v1(22.606,13.335) 23.025,12.916 23.025,11.769 23.483,11.311 25.127,11.311 25.35,11.088 25.35,10.591 26.035,9.906 26.924,9.906 27.432,9.398 ; v1@22.689,13.441 cw(c22.153,12.753) 23.025,12.753 ; v1@27.25,9.089 ccw(c27.078,9.398) 27.432,9.398 ; v1(27.432,8.763) 27.432,9.398 ; v1@27.614,9.089 cw(c27.786,9.398) 27.432,9.398 ; C18.2@32.705,15.519 34.442,15.519 v1(34.925,16.002) ; C18.2@33.001,15.223 cw(c33.716,14.508) 33.716,15.519 cw(c33.716,16.531) C18.2@33.001,15.816 ; C18.2@33.181,15.044 cw(c34.33,13.895) 34.33,15.519 cw(c34.33,17.144) C18.2@33.181,15.995 ; v1@42.555,15.23 cw(c43.191,14.594) 43.191,15.494 cw(c43.191,16.394) v1@42.555,15.758 ; 42.86,15.494 cw(c42.86,14.578) C24.2@43.542,15.19 ; 42.903,15.494 ccw(c42.903,16.418) C24.2@43.557,15.765 ; C24.2@43.353,15.02 ccw(c42.291,14.068) v1(42.291,15.494) ; C24.2@43.377,15.945 cw(c42.291,17.028) v1(42.291,15.494) ; C24.2@43.854,15.519 43.828,15.494 v1(42.291,15.494)
pads on no net: U1.1 U1.8 U3.1 U3.2 U3.3 U6.1 U6.6 U6.7 U9.3
copper on no net: | length 41.9
  Top Layer w0.025: 1.295,21.209 1.524,21.209 ; 1.295,21.234 1.499,21.234 ; 1.295,21.26 1.499,21.26 ; 1.295,21.285 1.499,21.285 ; 1.295,21.311 1.499,21.311 ; 1.295,21.336 1.499,21.336 ; 1.295,21.361 1.499,21.361 ; 1.295,21.387 1.499,21.387 ; 1.321,21.006 1.549,21.006 ; 1.321,21.031 1.524,21.031 ; 1.321,21.057 1.524,21.057 ; 1.321,21.082 1.524,21.082 ; 1.321,21.107 1.524,21.107 ; 1.321,21.133 1.524,21.133 ; 1.321,21.158 1.524,21.158 ; 1.321,21.184 1.524,21.184 ; 1.346,20.828 1.549,20.828 ; 1.346,20.853 1.549,20.853 ; 1.346,20.879 1.549,20.879 ; 1.346,20.904 1.549,20.904 ; 1.346,20.93 1.549,20.93 ; 1.346,20.955 1.549,20.955 ; 1.346,20.98 1.549,20.98 ; 1.372,20.65 1.575,20.65 ; 1.372,20.676 1.575,20.676 ; 1.372,20.701 1.575,20.701 ; 1.372,20.726 1.575,20.726 ; 1.372,20.752 1.575,20.752 ; 1.372,20.777 1.575,20.777 ; 1.372,20.803 1.549,20.803 ; 1.397,20.472 1.727,20.472 ; 1.397,20.498 1.727,20.498 ; 1.397,20.523 1.753,20.523 ; 1.397,20.549 1.753,20.549 ; 1.397,20.574 1.778,20.574 ; 1.397,20.599 1.803,20.599 ; 1.397,20.625 1.575,20.625 ; 1.422,20.396 1.676,20.396 ; 1.422,20.422 1.702,20.422 ; 1.422,20.447 1.702,20.447 ; 1.626,20.625 1.803,20.625 ; 1.626,20.65 1.829,20.65 ; 1.651,20.676 1.829,20.676 ; 1.651,20.701 1.854,20.701 ; 1.676,20.726 1.854,20.726 ; 1.676,20.752 1.88,20.752 ; 1.702,20.777 1.88,20.777 ; 1.702,20.803 1.905,20.803 ; 1.727,20.828 1.905,20.828 ; 1.727,20.853 1.93,20.853 ; 1.753,20.879 1.956,20.879 ; 1.753,20.904 1.956,20.904 ; 1.778,20.93 1.981,20.93 ; 1.778,20.955 1.981,20.955 ; 1.803,20.98 2.007,20.98 ; 1.803,21.006 2.007,21.006 ; 1.829,21.031 2.032,21.031 ; 1.829,21.057 2.032,21.057 ; 1.854,21.082 2.057,21.082 ; 1.854,21.107 2.057,21.107 ; 1.88,21.133 2.083,21.133 ; 1.88,21.158 2.083,21.158 ; 1.905,21.184 2.108,21.184 ; 1.905,21.209 2.134,21.209 ; 1.93,21.234 2.134,21.234 ; 1.93,21.26 2.159,21.26 ; 1.956,21.285 2.159,21.285 ; 1.956,21.311 2.184,21.311 ; 1.981,21.336 2.184,21.336 ; 1.981,21.361 2.21,21.361 ; 2.007,21.387 2.21,21.387 ; 2.159,20.396 2.769,20.396 ; 2.159,20.422 2.794,20.422 ; 2.159,20.447 2.794,20.447 ; 2.184,20.472 2.794,20.472 ; 2.184,20.498 2.794,20.498 ; 2.21,20.523 2.794,20.523 ; 2.311,21.107 2.362,21.107 ; 2.311,21.133 2.413,21.133 ; 2.311,21.158 2.464,21.158 ; 2.311,21.184 2.515,21.184 ; 2.337,21.209 2.743,21.209 ; 2.337,21.234 2.743,21.234 ; 2.388,21.26 2.769,21.26 ; 2.413,20.549 2.616,20.549 ; 2.413,20.574 2.616,20.574 ; 2.413,20.599 2.616,20.599 ; 2.413,21.285 2.769,21.285 ; 2.438,20.625 2.642,20.625 ; 2.438,20.65 2.642,20.65 ; 2.438,20.676 2.642,20.676 ; 2.438,20.701 2.642,20.701 ; 2.438,20.726 2.642,20.726 ; 2.464,20.752 2.667,20.752 ; 2.464,20.777 2.667,20.777 ; 2.464,20.803 2.667,20.803 ; 2.464,20.828 2.667,20.828 ; 2.464,20.853 2.667,20.853 ; 2.464,21.311 2.769,21.311 ; 2.489,20.879 2.692,20.879 ; 2.489,20.904 2.692,20.904 ; 2.489,20.93 2.692,20.93 ; 2.489,20.955 2.692,20.955 ; 2.489,20.98 2.692,20.98 ; 2.515,21.006 2.718,21.006 ; 2.515,21.031 2.718,21.031 ; 2.515,21.057 2.718,21.057 ; 2.515,21.082 2.718,21.082 ; 2.515,21.107 2.718,21.107 ; 2.515,21.336 2.769,21.336 ; 2.54,21.133 2.743,21.133 ; 2.54,21.158 2.743,21.158 ; 2.54,21.184 2.743,21.184 ; 2.565,21.361 2.769,21.361 ; 2.591,21.387 2.769,21.387 ; 2.921,20.447 3.48,20.447 ; 2.921,20.472 3.505,20.472 ; 2.921,20.498 3.531,20.498 ; 2.921,20.523 3.556,20.523 ; 2.921,20.549 3.099,20.549 ; 2.946,20.422 3.454,20.422 ; 2.946,20.574 3.048,20.574 ; 2.946,20.599 2.997,20.599 ; 2.997,20.396 3.404,20.396 ; 3.073,20.371 3.302,20.371 ; 3.073,21.006 3.378,21.006 ; 3.073,21.031 3.327,21.031 ; 3.073,21.057 3.302,21.057 ; 3.073,21.082 3.277,21.082 ; 3.073,21.107 3.277,21.107 ; 3.073,21.133 3.277,21.133 ; 3.073,21.158 3.277,21.158 ; 3.073,21.184 3.277,21.184 ; 3.073,21.209 3.302,21.209 ; 3.099,20.955 3.454,20.955 ; 3.099,20.98 3.404,20.98 ; 3.099,21.234 3.327,21.234 ; 3.099,21.26 3.353,21.26 ; 3.124,20.93 3.505,20.93 ; 3.124,21.285 3.683,21.285 ; 3.15,20.904 3.531,20.904 ; 3.15,21.311 3.683,21.311 ; 3.175,20.879 3.556,20.879 ; 3.175,21.336 3.683,21.336 ; 3.2,21.361 3.683,21.361 ; 3.226,20.853 3.581,20.853 ; 3.251,20.828 3.581,20.828 ; 3.251,21.387 3.632,21.387 ; 3.302,20.549 3.581,20.549 ; 3.302,20.803 3.607,20.803 ; 3.327,20.777 3.607,20.777 ; 3.327,21.412 3.556,21.412 ; 3.353,20.574 3.581,20.574 ; 3.378,20.599 3.607,20.599 ; 3.378,20.625 3.607,20.625 ; 3.378,20.726 3.607,20.726 ; 3.378,20.752 3.607,20.752 ; 3.404,20.65 3.607,20.65 ; 3.404,20.676 3.607,20.676 ; 3.404,20.701 3.607,20.701 ; 3.531,21.26 3.658,21.26 ; 3.607,21.234 3.658,21.234

## Keep-outs
Keep-Out Layer:
  lines w0.3: 0,0 0,22.177 108.204,22.177 108.204,0 0,0

## Other copper
Top Layer:
  region net BGND: 39.243,16.383 38.735,15.875 39.751,15.875
  region net BGND: 59.436,3.683 57.785,3.683 58.674,4.572
  region net HGND: 64.135,3.302 63.373,2.54 65.024,2.54
  region net -5V0: 70.993,18.796 70.993,17.78 69.85,18.796
  pour cut-out: 107.95,22.098 99.187,22.098 99.187,1.143 107.95,1.143
  region net VCC_IN: 16.256,10.16 15.621,10.795 15.621,9.525
Bottom Layer:
  region net NetC4_1: 78.994,14.224 74.93,14.224 74.93,9.652 78.994,9.652
  region net SGND: 68.961,14.478 72.771,14.478 72.771,9.525 68.961,9.525
  region net NetQ4_1: 56.769,8.763 57.277,9.271 57.277,8.255
  pour cut-out: 107.95,22.098 99.187,22.098 99.187,1.143 107.95,1.143
  region net NetQ10_3: 28.321,2.921 27.686,2.286 28.956,2.286
  region net SR+: 94.107,4.191 94.107,1.143 95.758,1.143 95.758,4.191
  region net NetC3_1: 90.805,4.191 90.805,1.143 92.456,1.143 92.456,4.191

## Text inside footprints (layer, text, board x,y; h text height)
C1: Bottom Overlay "+" at 71.793,4.017 h1
C4: Bottom Overlay "+" at 75.717,11.227 h1 r180
C8: Bottom Overlay "+" at 12.319,11.967 h1
C12: Top Overlay "+" at 71.918,13.005 h1 r180
C13: Top Overlay "+" at 71.918,10.465 h1 r180
C15: Bottom Overlay "+" at 33.517,8.803 h1
C23: Bottom Overlay "+" at 45.212,9.098 h1
P1: Top Overlay "2" at 2.286,3.81 h1 r90; Top Overlay "1" at 4.826,4.318 h1 r90; Top Overlay "9" at 4.826,18.034 h1 r90; Top Overlay "10" at 2.286,18.034 h1 r90